# EAGLE board riffle-beta-0.1.3.1 (EAGLE 7.5.0)
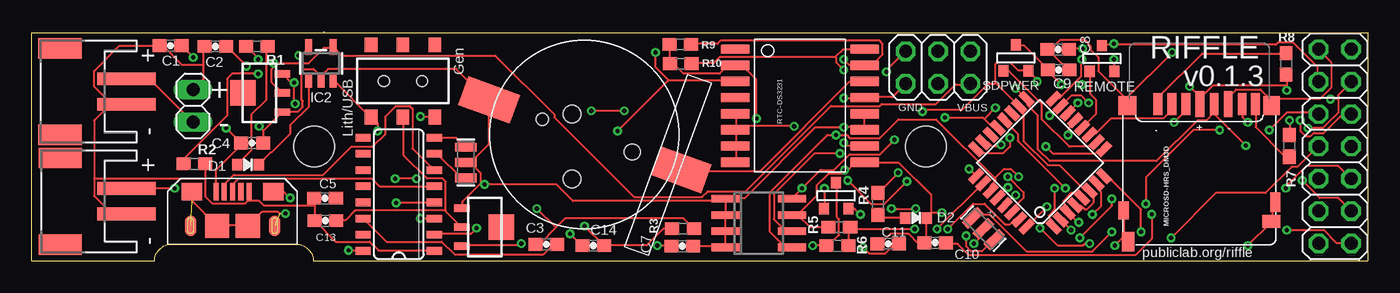
[diagram p0: board, top side]
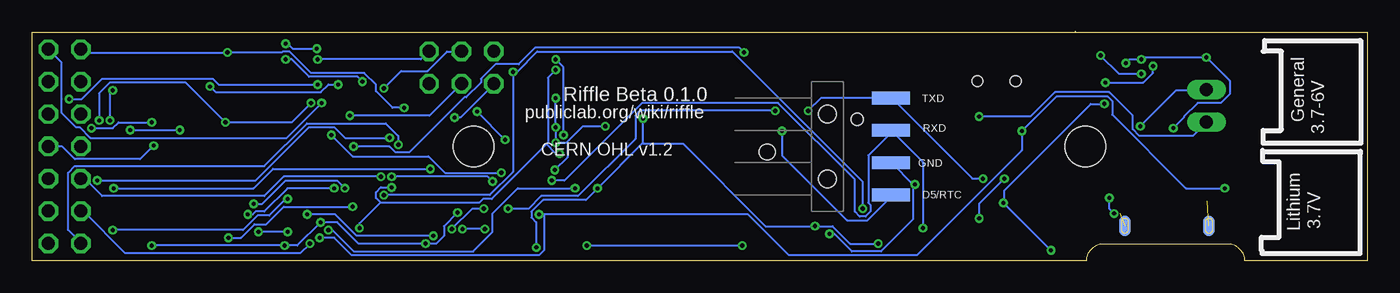
[diagram p1: board, bottom side, seen from below]

Size 104.8 x 18.01 mm. Coordinates in mm from the lower left corner, seen from the top.
Outline: 22.91,18.01 22.96,18.01
Outline: 0,0 0,17.96 104.8,17.96 104.8,0 22.07,0 arc90 20.75,1.32 10.95,1.32 arc90 9.63,0 0,0
Copper layers (1*16): Top 0.0356mm / dielectric 1.5011mm / Bottom 0.0356mm
Design rules "LaenPCBOrder": minimum track width 6mil, minimum drill 13mil, track to track 6mil, track to pad 6mil, pad to pad 6mil, via to via 6mil, smd to smd 6mil, copper to edge 15mil, drill to drill 6mil, minimum pad ring 7mil, minimum via ring 7mil, stop-mask expansion 3mil, vias tented up to drill 0mil, thermal gap 10mil
Holes 3.2 mm at 70.13,9 22.13,9

## Footprints (pad centres in the part's own frame; a part is rotated, then mirrored left to right if it is on the bottom)
BATTCON_12MM_SMT = smd 2.4 x 4.3: P$1 0,11.96 | smd 2.4 x 4.2: P$2 0,-4.1 | hole 0.95: 0,7.5 | hole 1.25: 0,0
SOT-23 = smd 0.787 x 0.889: 1 0.025,-1.016; 2 -0.94,1.016; 3 0.991,1.016
0603-CAP = smd 1.1 x 1: 1 -0.85,0; 2 0.85,0
JST-PH-2-SMT-RA = smd 1 x 4.6: 1 1,-3.7; 2 -1,-3.7 | smd 1.6 x 3.4: NC1 -3.4,1.5; NC2 3.4,1.5
0603-LED = smd 0.8 x 0.9: MINUS -0.85,0; PLUS 0.85,0
TQFP32-08 = smd 1.27 x 0.559: 1 -4.293,2.8; 2 -4.293,2; 3 -4.293,1.2; 4 -4.293,0.4; 5 -4.293,-0.4; 6 -4.293,-1.2; 7 -4.293,-2; 8 -4.293,-2.8; 17 4.293,-2.8; 18 4.293,-2; 19 4.293,-1.2; 20 4.293,-0.4; 21 4.293,0.4; 22 4.293,1.2; 23 4.293,2; 24 4.293,2.8 | smd 0.559 x 1.27: 9 -2.8,-4.293; 10 -2,-4.293; 11 -1.2,-4.293; 12 -0.4,-4.293; 13 0.4,-4.293; 14 1.2,-4.293; 15 2,-4.293; 16 2.8,-4.293; 25 2.8,4.293; 26 2,4.293; 27 1.2,4.293; 28 0.4,4.293; 29 -0.4,4.293; 30 -1.2,4.293; 31 -2,4.293; 32 -2.8,4.293
SO16 = smd 0.6 x 1.2: 1 -4.445,-2.8; 2 -3.175,-2.8; 3 -1.905,-2.8; 4 -0.635,-2.8; 5 0.635,-2.8; 6 1.905,-2.8; 7 3.175,-2.8; 8 4.445,-2.8; 9 4.445,2.8; 10 3.175,2.8; 11 1.905,2.8; 12 0.635,2.8; 13 -0.635,2.8; 14 -1.905,2.8; 15 -3.175,2.8; 16 -4.445,2.8
SOT89 = smd 0.58 x 1.2: 1 -1.5,-1.8; 2 0,-1.8; 3 1.5,-1.8 | smd 2 x 2: 4 0,1.3
SO-08 = smd 0.6 x 2.2: 1 -1.905,-2.6; 2 -0.635,-2.6; 3 0.635,-2.6; 4 1.905,-2.6; 5 1.905,2.6; 6 0.635,2.6; 7 -0.635,2.6; 8 -1.905,2.6
2X03 = drill 1.016 octagon: 1 -2.54,-1.27; 2 -2.54,1.27; 3 0,-1.27; 4 0,1.27; 5 2.54,-1.27; 6 2.54,1.27
AYZ0202 = smd 1 x 1.15: 1 -2.5,2.825; 2 0,2.825; 3 2.5,2.825; 4 -2.5,-2.825; 5 0,-2.825; 6 2.5,-2.825 | hole 0.85: 1.5,0; -1.5,0
MICROUSB-RIGHT = smd 0.4 x 1.35: 1 -1.3,1.27; 2 -0.65,1.27; 3 0,1.27; 4 0.65,1.27; 5 1.3,1.27 | smd 0.9 x 1.6: S1 -3.3,-1.4; S2 3.3,-1.4 | smd 1.6 x 1.4: S3 -3.2,1.27; S4 3.2,1.27 | smd 1.9 x 1.9: S5 -1.2,-1.405; S6 1.2,-1.405 | smd 0.9 x 1.6 bottom: S7 -3.3,-1.4; S8 3.3,-1.4
1X02 = drill 1.016 long: 1 -1.27,0; 2 1.27,0
1X04-SMD = smd 1 x 3: 1 -3.81,5; 2 -1.27,5; 3 1.27,5; 4 3.81,5 | hole 1.4: -2.54,0; 2.54,0
2X07 = drill 1.016 octagon: 1 -7.62,-1.27; 2 -7.62,1.27; 3 -5.08,-1.27; 4 -5.08,1.27; 5 -2.54,-1.27; 6 -2.54,1.27; 7 0,-1.27; 8 0,1.27; 9 2.54,-1.27; 10 2.54,1.27; 11 5.08,-1.27; 12 5.08,1.27; 13 7.62,-1.27; 14 7.62,1.27
0603-NO = smd 1.1 x 1: 1 -0.85,0; 2 0.85,0
DS3231 = smd 0.762 x 2.286: 1 -4.445,-5.08; 2 -3.175,-5.08; 3 -1.905,-5.08; 4 -0.635,-5.08; 5 0.635,-5.08; 6 1.905,-5.08; 7 3.175,-5.08; 8 4.445,-5.08; 9 4.445,5.08; 10 3.175,5.08; 11 1.905,5.08; 12 0.635,5.08; 13 -0.635,5.08; 14 -1.905,5.08; 15 -3.175,5.08; 16 -4.445,5.08
SOT23-5 = smd 0.55 x 1.2: 1 -0.95,-1.3; 2 0,-1.3; 3 0.95,-1.3; 4 0.95,1.3; 5 -0.95,1.3
DM3D = smd 0.7 x 1.75: CD/DAT3 8.15,0.45; CLK 4.85,0.45; CMD 7.05,0.45; DAT0 2.65,0.45; DAT1 1.6,0.45; DAT2 9.25,0.45 | smd 0.8 x 1.5: GND1 0.05,8.15 | smd 0.8 x 1.4: GND2 11.95,8.8 | smd 1.4 x 1.5: GND3 11.65,0.55 | smd 1.3 x 1.5: GND4 0.35,0.55 | smd 1 x 1.55: SW_A 11.6,11.25 | smd 1.4 x 1: SW_B 0.35,9.65 | smd 0.7 x 2.032: VDD 5.95,0.45; VSS 3.75,0.45
RESONATOR-SMD = smd 0.7 x 1.7: 1 -1.2,0; 2 0,0; 3 1.2,0

## Placement (x,y rotation side)
BAT  CR1220  [BATTCON_12MM_SMT]  47.1,8.57 70 top
BATTPOWER  FDN340P  [SOT-23]  63.12,5.14 180 top
C1  10uF  [0603-CAP]  10.88,16.92 0 top
C2  0.1uF  [0603-CAP]  14.39,16.86 180 top
C3  0.1uF  [0603-CAP]  40.37,1.31 0 top
C4  10uF  [0603-CAP]  17.28,9.28 0 top
C5  10uF  [0603-CAP]  23,4.94 180 top
C7  0.1uF  [0603-CAP]  51.03,1.17 180 top
C8  0.1uF  [0603-CAP]  80.53,16.62 180 top
C9  0.1uF  [0603-CAP]  80.57,15.01 180 top
C10  0.1uF  [0603-CAP]  70.86,1.44 180 top
C11  0.1uF  [0603-CAP]  67.19,1.36 0 top
C13  10uF  [0603-CAP]  23.04,3.17 180 top
C14  10uF  [0603-CAP]  44.04,1.22 180 top
CN1  [JST-PH-2-SMT-RA]  3.72,4.7 90 top
CN2  [JST-PH-2-SMT-RA]  3.71,13.31 90 top
D1  LED0603  [0603-LED]  16.96,7.57 180 top
D2  LED0603  [0603-LED]  69.37,3.38 180 top
IC1  ATMEGA328P  [TQFP32-08]  79.09,7.72 135 top
IC3  CH340G  [SO16]  28.79,5.24 90 top
IC4  MCP1700-33  [SOT89]  35.53,2.67 270 top
IC5  24AA128SN  [SO-08]  57.02,2.98 270 top
IC6  MCP1700-33  [SOT89]  17.86,13.21 90 top
ISP  [2X03]  71.1,15.2 180 top
J1  AYZ0202  [AYZ0202]  29.11,14.14 180 top
J2  [MICROUSB-RIGHT]  15.75,4.17 0 top
JP1  [1X02]  12.64,12.2 90 top
JP3  [1X04-SMD]  42.39,9 270 bottom
JP5  [2X07]  102.23,9.01 270 top
R1  10K  [0603-NO]  17.66,16.87 180 top
R2  4.7K  [0603-NO]  12.74,7.65 180 top
R3  10K  [0603-NO]  51.09,2.55 180 top
R4  10K  [0603-NO]  66.37,4.5 90 top
R5  10K  [0603-NO]  63.35,2.66 0 top
R6  10K  [0603-NO]  63.2,1.22 180 top
R7  10K  [0603-NO]  98.65,9.05 270 top
R8  10K  [0603-NO]  98.4,15.49 270 top
R9  10K  [0603-NO]  50.91,15.5 180 top
R10  10K  [0603-NO]  50.88,17.03 180 top
REMOTE  FDN340P  [SOT-23]  83.98,15.91 180 top
RTC-DS3231  DS3231  [DS3231]  60.27,12.21 270 top
SDPWER  FDN340P  [SOT-23]  77.23,15.95 180 top
U1  MCP73831T-2ACI/OT  [SOT23-5]  22.68,15.52 0 top
U$1  MICROSD-HRS_DM3D  [DM3D]  97.6,12.78 180 top
X2  12MHz  [RESONATOR-SMD]  34.06,7.74 90 top
X3  16 MHz  [RESONATOR-SMD]  74.66,2.55 135 top

## Library data of the parts
BAT IC3 J1 X2 = SparkFunNew
BATTPOWER REMOTE SDPWER = zetex; OC_FARNELL: unknown; OC_NEWARK: unknown
C1-C5 C7-C11 C13 C14 JP3 X3 = SparkFun
CN1 CN2 IC4 IC6 = adafruit
D1 D2 = LowPowerLab
IC1 = atmel; MPN: ATMEGA8-16AU; OC_FARNELL: 9171371; OC_NEWARK: 73M8863
IC5 = microchip; MF: MICROCHIP; MPN: 24AA128-I/SN; OC_FARNELL: unknown; OC_NEWARK: 92C6842
ISP JP1 JP5 = pinhead
J2 = MF_Connectors
R1-R10 U1 = microbuilder
RTC-DS3231 = _lh-library
U$1 = hrs_DM3D-SF

## Nets
A0: IC1.23 JP5.13
A1: IC1.24 JP5.12
A2: IC1.25 JP5.10
A3: IC1.26 R5.2 R6.1
AREF: C10.1 IC1.20
D2: IC1.32 JP5.7
D3: IC1.1 JP5.5
D4: BATTPOWER.3 IC1.2
D5/RTC: IC1.9 JP3.4 RTC-DS3231.3
D6: IC1.10 SDPWER.3
D7: IC1.11 U$1.CD/DAT3
D8: IC1.12 REMOTE.3
D9: IC1.13 R4.2
D10: IC1.14 JP5.2
D+: IC3.5 J2.3
D-: IC3.6 J2.2
GND: BAT.P$1 C1.1 C2.2 C4.2 C5.2 C7.1 C8.2 C9.1 C10.2 C11.1 C13.2 C14.2 CN1.2 CN2.2 D2.MINUS IC1.3 IC1.5 IC1.21 IC3.1 IC4.1 IC5.1 IC5.2 IC5.3 IC5.4 IC5.7 IC6.1 ISP.6 J2.5 JP1.2 JP3.3 JP5.1 R2.1 R5.1 RTC-DS3231.5 RTC-DS3231.6 RTC-DS3231.7 RTC-DS3231.8 RTC-DS3231.9 RTC-DS3231.10 RTC-DS3231.11 RTC-DS3231.12 RTC-DS3231.13 U1.2 U$1.GND1 U$1.GND2 U$1.GND3 U$1.GND4 U$1.SW_A U$1.SW_B U$1.VSS X2.2 X3.2
MISO: IC1.16 ISP.1 JP5.4 U$1.DAT0
MOSI: IC1.15 ISP.4 JP5.6 U$1.CMD
N$1: D1.PLUS R1.1
N$2: IC1.7 X3.1
N$3: IC1.8 X3.3
N$4: C9.2 R7.1 R8.2 SDPWER.1 U$1.VDD
N$5: D1.MINUS U1.1
N$6: R2.2 U1.5
N$7: C8.1 JP5.3 REMOTE.1
N$8: C2.1 IC3.4 IC3.16 IC6.3
N$11: IC3.7 X2.1
N$13: IC3.8 X2.3
N$15: BATTPOWER.1 C7.2 R6.2
N$16: R7.2 U$1.DAT1
N$17: D2.PLUS R4.1
N$18: R8.1 U$1.DAT2
RESET: C3.1 IC1.29 ISP.5 R3.1
RST: C3.2 IC3.14
RTC_BATT: BAT.P$2 RTC-DS3231.14
RXD: IC1.30 IC3.2 JP3.2
SCK: IC1.17 ISP.3 JP5.8 U$1.CLK
SCL: IC1.28 IC5.6 JP5.11 R9.1 RTC-DS3231.16
SDA: IC1.27 IC5.5 JP5.9 R10.1 RTC-DS3231.15
SLD: J2.S1 J2.S2 J2.S3 J2.S4 J2.S5 J2.S6 J2.S7 J2.S8
TXD: IC1.31 IC3.3 JP3.1
VBAT [vcc]: BATTPOWER.2 CN1.1 J1.3 JP5.14 U1.3
VBUS [vcc]: C1.2 C4.1 IC6.2 ISP.2 J2.1 R1.2 U1.4
VCC: C11.2 C14.1 IC1.4 IC1.6 IC1.18 IC4.3 IC5.8 R3.2 R9.2 R10.2 REMOTE.2 RTC-DS3231.2 SDPWER.2
VDD: C13.1 IC4.2 J1.2
VGEN: CN2.1 J1.1 JP1.1

## Tracks (layer width: path | path; a pad name or v marks a point on that pad's centre or on a via)
A0  (via drill 0.33)
  Top 0.152: v76.05,9.14 75.9,8.99 75.36,8.99 75.06,9.3 74.68,9.3 IC1.23
  Bottom 0.152: v76.05,9.14 76.05,9.83 77.04,10.82 83.21,10.82 86.56,7.47 101.42,7.47 101.96,6.93 101.96,2.44 100.96,1.45 JP5.13
A1  (via drill 0.33)
  Top 0.152: v76.73,9.68 76.73,8.99 76.2,8.46 74.75,8.46 74.45,8.76 74.14,8.76 IC1.24 | v99.67,6.33 101.04,4.95 102.49,4.95 103.48,3.96 JP5.12
  Bottom 0.152: v76.73,9.68 80.24,9.68 81.08,10.52 83.06,10.52 87.25,6.33 v99.67,6.33
A2  (via drill 0.33)
  Top 0.152: v73.53,7.24 74.07,6.71 IC1.25 | v98.37,5.71 98.37,5.87 99.97,7.47 102.49,7.47 103.48,6.48 JP5.10
  Bottom 0.152: v73.53,7.24 85.88,7.24 87.4,5.71 v98.37,5.71
A3  (via drill 0.33)
  Top 0.152: R6.1 64.08,1.22 64.08,2.52 64.16,2.59 R5.2 64.16,2.52 v69.27,2.52 | v71.02,2.52 74.6,6.1 IC1.26
  Bottom 0.152: v69.27,2.52 v71.02,2.52
AREF  (via drill 0.33)
  Top 0.152: v87.86,3.66 87.86,1.75 86.56,0.46 73.53,0.46 72.62,1.37 71.78,1.37 C10.1 | v81.08,5.71 77.34,9.45 77.34,9.98 76.35,10.97 IC1.20
  Bottom 0.152: v87.86,3.66 87.48,3.66 87.25,3.89 86.56,3.89 84.73,5.71 v81.08,5.71
D2  (via drill 0.33)
  Top 0.152: v79.63,4.27 78.1,2.74 IC1.32 | v89.38,1.83 92.89,5.33 96.77,5.33 98.83,7.39 99.29,7.39 100.89,8.99 JP5.7
  Bottom 0.152: v79.63,4.27 85.04,4.27 86.41,2.9 87.33,2.9 88.39,1.83 v89.38,1.83
D3  (via drill 0.33)
  Top 0.152: v80.24,5.71 80.24,4.04 79.78,3.58 79.78,3.43 80.09,3.12 80.09,2.74 IC1.1 | v87.4,4.5 87.4,6.55 91.14,10.29 v93.19,10.29 | v97.08,10.29 98.45,11.66 100.81,11.66 100.89,11.58 JP5.5
  Bottom 0.152: v80.24,5.71 80.85,6.33 84.89,6.33 86.72,4.5 v87.4,4.5 | v97.08,10.29 v93.19,10.29
D4  (via drill 0.33)
  Top 0.152: v62.18,5.71 62.18,4.19 BATTPOWER.3 | v81.53,2.44 80.77,3.2 IC1.2
  Bottom 0.152: v62.18,5.71 66.67,5.71 68.66,3.73 68.66,2.29 70.18,0.76 79.55,0.76 81.23,2.44 v81.53,2.44
D5/RTC  (via drill 0.33)
  Top 0.152: v79.55,8.99 80.09,8.46 83.44,8.46 83.74,8.76 84.05,8.76 IC1.9 | v48.92,16.38 48.92,15.24 49.95,14.21 | 49.95,14.21 49.99,14.17 55.17,14.17 RTC-DS3231.3 | 49.95,14.21 v45.95,10.21
  Bottom 0.152: v79.55,8.99 76.73,8.99 76.28,8.53 75.21,8.53 70.87,12.88 70.71,12.88 69.57,14.02 69.57,14.33 68.43,15.47 66.6,15.47 65.3,16.76 49.3,16.76 v48.92,16.38 | v45.95,10.21 45.95,8.31 40.84,3.2 39.24,3.2 37.41,5.03 37.41,5.18 JP3.4
D6
  Top 0.152: SDPWER.3 76.28,14.94 76.66,14.94 79.25,12.34 79.25,11.12 81.38,8.99 83.21,8.99 83.52,9.3 IC1.10
D7
  Top 0.152: IC1.11 82.98,9.98 83.44,9.98 84.66,11.2 88.77,11.2 89.38,11.81 89.38,12.27 U$1.CD/DAT3
D8
  Top 0.152: REMOTE.3 83.06,14.86 83.06,13.11 83.52,12.65 83.52,11.58 82.45,10.52 IC1.12
D9  (via drill 0.33)
  Top 0.152: v67.97,6.93 66.45,5.41 R4.2 | v81.31,9.91 81.31,10.44 81.84,10.97 IC1.13
  Bottom 0.152: v67.97,6.93 72.39,6.93 73.69,8.23 79.63,8.23 v81.31,9.91
D10  (via drill 0.33)
  Top 0.152: v82.07,12.42 81.31,11.66 IC1.14
  Bottom 0.152: v82.07,12.42 84.81,9.68 100.2,9.68 101.04,10.52 101.35,10.52 102.49,11.66 102.49,15.62 103.48,16.61 JP5.2
D+
  Top 0.152: IC3.5 31.55,5.87 27.28,5.87 26.67,6.48 16.23,6.48 15.77,6.02 15.77,5.49 J2.3
D-
  Top 0.152: IC3.6 31.55,7.16 29.87,8.84 29.87,11.96 29.64,12.19 28.57,12.19 27.74,11.35 27.74,9.98 26.75,8.99 25.07,8.99 22.86,6.78 15.85,6.78 15.16,6.1 15.16,5.49 J2.2
GND  (via drill 0.33)
  Top 0.152: R5.1 62.48,2.67 61.04,2.67 60.12,3.58 59.66,3.58 IC5.7 60.2,3.58 60.2,3.73 61.57,5.11 61.57,5.94 62.48,6.86 63.7,6.86 63.89,7.05 | U$1.GND2 85.72,3.96 85.72,1.83 85.95,1.6 U$1.SW_A 85.72,1.75 85.5,1.75 v84.96,1.22 | U$1.GND1 97.54,4.57 97.31,4.34 97.31,3.2 U$1.SW_B 97.23,3.05 v95.4,1.22 | IC1.5 82.37,5.03 82.07,5.33 81.53,5.33 80.92,4.72 80.92,4.57 81.23,4.27 81.23,3.89 IC1.3 81.31,3.81 82.07,3.05 v82.14,3.05 | D2.MINUS 70.18,3.35 70.18,1.6 70.03,1.45 C10.2 69.95,1.45 69.49,1.45 68.81,2.13 67.36,2.13 66.6,1.37 66.37,1.37 C11.1 | v73.91,1.37 74.6,2.06 74.6,2.52 X3.2 | v71.4,3.81 70.64,3.81 70.26,3.43 D2.MINUS | D2.MINUS 70.56,3.81 70.56,5.18 68.05,7.7 65.38,7.7 RTC-DS3231.9 65.3,7.7 64.54,7.7 63.89,7.05 | 13.64,6.48 13.64,5.03 14.17,4.5 16.69,4.5 16.95,4.76 | 13.64,6.48 13.64,7.62 R2.1 | 16.95,4.76 16.99,4.8 16.99,5.41 J2.5 | 31.62,0.84 IC3.1 31.55,0.84 27.2,0.84 26.52,1.52 23.85,1.52 22.25,3.12 C13.2 22.17,3.2 22.17,4.34 | 22.17,4.34 22.17,4.88 C5.2 | 22.17,4.34 18.21,4.34 17.83,4.72 16.99,4.72 16.95,4.76 | 13.49,15.39 13.49,14.33 12.65,13.49 JP1.2 | 13.49,15.39 13.49,16.84 C2.2 | 13.49,15.39 11.81,15.39 10.29,16.92 10.06,16.92 C1.1 9.98,16.92 6.86,16.92 4.88,14.94 4.88,13.72 6.25,12.34 7.39,12.34 CN2.2 6.17,12.34 4.88,11.05 4.88,6.48 | 4.88,6.48 4.88,5.11 6.25,3.73 7.39,3.73 CN1.2 | 4.88,6.48 13.64,6.48 | v42.21,2.13 43.13,1.22 C14.2 | 18.17,10.25 19.58,11.66 IC6.1 19.66,11.73 20.88,11.73 21.26,12.12 21.26,12.57 21.18,12.65 21.18,14.94 21.34,15.09 22.1,15.09 22.63,14.55 22.63,14.25 U1.2 22.63,14.63 22.78,14.63 23.24,15.09 33.3,15.09 35.74,12.65 BAT.P$1 35.81,12.65 35.81,9.14 34.52,7.85 34.52,7.7 X2.2 34.06,7.7 34.44,7.7 35.2,6.93 35.2,6.1 35.17,6.06
  Top 0.152: 18.17,10.25 18.14,10.21 18.14,9.3 C4.2 | 35.17,6.06 33.76,4.65 33.76,4.19 IC4.1 | 35.17,6.06 35.2,6.02 v35.51,6.02 41.15,6.02 42.44,4.72 54.41,4.72 | C9.1 81.38,15.09 81.23,15.09 79.71,16.61 C8.2 79.86,16.54 80.7,17.37 82.6,17.37 83.06,16.92 83.06,16.61 83.67,16 83.67,14.94 85.88,12.72 85.88,12.27 U$1.GND3 85.88,12.8 v89.46,16.38 | U$1.VSS 93.88,12.34 93.88,12.88 94.49,13.49 96.39,13.49 97.23,12.65 97.23,12.27 U$1.GND4 97.23,12.72 101.04,12.72 101.96,13.64 101.96,15.62 100.96,16.61 JP5.1 | 75.74,10.52 IC1.21 75.67,10.52 75.36,10.52 74.71,11.16 | 74.71,11.16 74.6,11.28 v71.63,11.28 | ISP.6 68.5,13.87 67.51,12.88 65.38,12.88 RTC-DS3231.13 65.3,12.8 v63.7,12.8 | RTC-DS3231.8 55.24,7.77 55.24,8.99 RTC-DS3231.7 55.24,9.07 55.24,10.29 RTC-DS3231.6 | 55.24,10.59 55.24,11.51 RTC-DS3231.5 | 55.24,10.59 55.24,10.36 RTC-DS3231.6 | v63.7,9.3 63.93,9.07 65.3,9.07 RTC-DS3231.10 | RTC-DS3231.12 65.3,11.51 65.3,10.44 RTC-DS3231.11 65.3,10.36 65.15,10.52 v63.7,10.52 61.49,10.52 55.93,4.95 54.48,4.95 IC5.1 | 54.41,4.72 54.41,4.88 IC5.1 | 54.41,4.72 54.41,3.66 IC5.2 54.41,3.58 54.41,2.36 IC5.3 54.41,2.29 54.41,1.22 IC5.4 | C7.1 51.89,1.14 54.41,1.14 IC5.4 | 54.41,1.07 IC5.4 | v59.82,10.59 55.24,10.59 | 55.24,10.59 RTC-DS3231.6 | 74.71,11.16 v75.59,12.04 | 54.41,4.72 IC5.1 | 18.17,10.25 v17.83,10.59 | v63.78,7.16 63.89,7.05
  Bottom 0.152: v71.4,3.81 72.47,2.74 72.47,1.98 73.08,1.37 v73.91,1.37 79.17,1.37 80.85,3.05 v82.14,3.05 83.97,1.22 v84.96,1.22 v95.4,1.22 | v42.21,2.13 41.83,2.13 40.46,0.76 38.18,0.76 35.66,3.28 35.66,6.02 | 35.66,6.02 37.34,7.7 JP3.3 | v35.51,6.02 35.66,6.02 | JP5.1 100.89,16.61 100.66,16.38 v89.46,16.38 85.19,16.38 85.12,16.46 84.58,16.46 82.91,14.78 78.71,14.78 77.8,13.87 77.8,13.34 76.5,12.04 v75.59,12.04 | v71.63,11.28 71.17,11.28 68.58,13.87 ISP.6 | v59.82,10.59 61.57,10.59 62.83,9.34 | 62.83,9.34 62.86,9.3 v63.7,9.3 v63.7,10.52 v63.7,12.8 | v17.83,10.59 15.01,13.41 12.65,13.41 JP1.2 | v63.78,7.16 62.79,8.15 62.79,9.3 62.83,9.34
MISO  (via drill 0.33)
  Top 0.152: 82.03,14.21 82.3,14.48 82.3,15.77 v82.37,15.85 | 82.03,14.21 80.62,12.8 80.16,12.8 IC1.16 | v95.4,10.9 95.02,11.28 95.02,12.27 U$1.DAT0 | v100.13,10.44 101.27,10.44 102.49,11.66 102.49,12.72 | 102.49,12.72 102.49,13.03 103.48,14.02 JP5.4 | v82.37,13.87 82.03,14.21 | 102.49,12.72 v101.88,12.72
  Bottom 0.152: v82.37,15.85 74.29,15.85 73.69,16.46 ISP.1 | v95.4,10.9 97.99,10.9 98.45,10.44 v100.13,10.44 | v82.37,13.87 90.14,13.87 90.6,14.33 99.29,14.33 100.89,12.72 v101.88,12.72
MOSI  (via drill 0.33)
  Top 0.152: v79.86,11.43 80.54,12.12 80.7,12.12 IC1.15 80.77,12.19 81.61,13.03 82.3,13.03 v82.91,12.42 | v89.61,10.9 90.53,11.81 90.53,12.27 U$1.CMD | v99.52,11.05 99.52,10.21 99.9,9.83 100.36,9.83 100.58,10.06 101.35,10.06 102.79,11.51 103.48,11.51 JP5.6
  Bottom 0.152: v79.86,11.43 73.61,11.43 71.17,13.87 ISP.4 | v82.91,12.42 84.43,10.9 v89.61,10.9 92.74,14.02 98.68,14.02 99.52,13.18 v99.52,11.05
N$1
  Top 0.152: D1.PLUS 16.15,7.62 17.22,8.69 17.22,11.51 18.36,12.65 18.36,16.76 18.44,16.84 R1.1
N$2  (via drill 0.33)
  Top 0.152: v83.21,3.66 83.9,4.34 83.9,5.41 83.59,5.71 83.59,6.1 IC1.7 | v73.3,1.98 73.3,1.14 73.69,0.76 74.52,0.76 75.44,1.68 X3.1
  Bottom 0.152: v83.21,3.66 81,3.66 79.32,1.98 v73.3,1.98
N$3  (via drill 0.33)
  Top 0.152: v87.02,2.29 87.02,4.04 84.43,6.63 84.12,6.63 IC1.8 | v84.73,2.29 83.21,0.76 78.03,0.76 75.13,3.66 74.07,3.66 73.84,3.43 X3.3
  Bottom 0.152: v84.73,2.29 v87.02,2.29
N$4  (via drill 0.33)
  Top 0.152: SDPWER.1 77.27,16.92 77.88,16.92 79.71,15.09 C9.2 79.71,14.94 v80.77,13.87 | v98.68,11.05 98.68,9.91 R7.1 | 98.45,13.79 98.45,14.63 R8.2 | 98.45,13.79 v98.45,13.41 | 98.45,13.79 92.66,13.79 91.67,12.8 91.67,12.34 U$1.VDD 91.67,12.88 v90.83,13.72
  Bottom 0.152: v98.68,11.05 98.68,13.18 v98.45,13.41 | v80.77,13.87 81.53,13.87 82.14,13.26 90.37,13.26 v90.83,13.72
N$5
  Top 0.152: D1.MINUS 17.83,7.62 18.75,8.53 18.82,8.53 20.27,9.98 20.27,10.67 21.72,12.12 21.72,14.17 U1.1
N$6  (via drill 0.33)
  Top 0.152: v17.75,14.71 15.7,14.71 15.32,14.33 15.32,11.43 11.96,8.08 11.96,7.7 R2.2 | v20.95,16.15 21.11,16.15 21.72,16.76 U1.5
  Bottom 0.152: v17.75,14.71 19.51,14.71 v20.95,16.15
N$7  (via drill 0.33)
  Top 0.152: 84.89,16.99 97.61,16.99 97.76,17.14 98.98,17.14 100.89,15.24 100.89,14.1 JP5.3 | 84.89,16.99 83.97,16.99 REMOTE.1 | v82.45,16.69 81.38,16.69 C8.1 | 84.89,16.99 v84.89,17.07
  Bottom 0.152: v82.45,16.69 84.35,16.69 84.73,17.07 v84.89,17.07
N$8  (via drill 0.33)
  Top 0.152: v16.84,15.32 15.32,16.84 C2.1 | IC6.3 20.35,14.02 v20.57,14.02 20.57,12.42 v20.65,12.34 | v24.84,0.84 25.98,0.84 IC3.16 | v28.57,4.57 31.55,4.57 IC3.4
  Bottom 0.152: v16.84,15.32 16.84,14.78 17.6,14.02 v20.57,14.02 | v24.84,0.84 v28.57,4.57 28.5,4.57 28.5,5.56 21.72,12.34 v20.65,12.34
N$11
  Top 0.152: IC3.7 31.62,8.38 31.85,8.38 33.68,6.55 33.99,6.55 X2.1
N$13
  Top 0.152: IC3.8 31.62,9.68 33.3,9.68 33.99,8.99 X2.3
N$15  (via drill 0.33)
  Top 0.152: BATTPOWER.1 63.17,6.1 63.17,3.43 63.32,3.28 63.32,2.06 62.41,1.14 R6.2 62.33,1.22 v61.26,1.22 | v49.07,1.22 50.14,1.22 C7.2
  Bottom 0.152: v61.26,1.22 v49.07,1.22
N$16
  Top 0.152: R7.2 98.6,8.23 98.3,8.23 96.01,10.52 96.01,12.27 U$1.DAT1
N$17
  Top 0.152: D2.PLUS 68.5,3.43 66.6,3.43 66.45,3.58 R4.1
N$18
  Top 0.152: R8.1 98.37,16.31 91.82,16.31 88.39,12.88 88.39,12.34 U$1.DAT2
RESET  (via drill 0.33)
  Top 0.152: 41.11,2.63 41.83,3.35 51.13,3.35 51.89,2.59 R3.1 | 41.11,2.63 39.85,1.37 39.55,1.37 C3.1 | v77.19,5.18 77.11,5.18 76.35,4.42 IC1.29 | v67.06,14.86 67.06,15.01 68.5,16.46 ISP.5 | v39.62,4.12 41.11,2.63
  Bottom 0.152: v77.19,5.18 68.88,5.18 67.06,7.01 v67.06,14.86 66.75,14.86 65.15,16.46 49.83,16.46 39.62,6.25 v39.62,4.12
RST
  Top 0.152: C3.2 41.15,1.29 40.92,1.29 40.16,0.53 33.15,0.53 32.16,1.52 27.81,1.52 26.06,3.28 IC3.14
RTC_BATT
  Top 0.152: RTC-DS3231.14 65.3,14.1 64.16,14.1 57.15,7.09 51.05,7.09 50.98,7.16 BAT.P$2
RXD  (via drill 0.33)
  Top 0.152: v34.9,2.59 34.44,2.13 31.62,2.13 IC3.2 | v76.58,6.63 77.8,5.41 77.8,4.95 76.96,4.12 76.96,3.89 IC1.30 | v68.66,6.25 66.9,4.5 65.84,4.5 v64.01,6.33
  Bottom 0.152: v34.9,2.59 34.9,7.77 37.34,10.21 JP3.2 37.34,10.13 39.17,8.31 39.17,4.57 39.01,4.42 39.01,3.89 39.4,3.5 39.85,3.5 40.23,3.89 40.23,6.4 46.25,12.42 56.92,12.42 63.02,6.33 v64.01,6.33 | v76.58,6.63 69.04,6.63 v68.66,6.25
SCK  (via drill 0.33)
  Top 0.152: v77.19,13.56 78.03,12.72 IC1.17 78.1,12.72 78.1,12.27 78.94,11.43 78.94,8.76 79.86,7.85 88.24,7.85 91.44,11.05 92.13,11.05 92.74,11.66 92.74,12.27 U$1.CLK 92.74,11.58 v95.25,9.07
  Bottom 0.152: v77.19,13.56 75.82,14.94 73.76,14.94 72.24,16.46 71.17,16.46 ISP.3 | v95.25,9.07 96.32,8 101.42,8 102.41,8.99 103.48,8.99 JP5.8
SCL  (via drill 0.33)
  Top 0.152: 63.06,16.04 63.63,16.61 65.3,16.61 RTC-DS3231.16 | 63.06,16.04 63.02,16 53.95,16 53.49,15.54 51.82,15.54 R9.1 | v76.58,5.79 75.82,5.03 IC1.28 | v63.7,15.01 63.09,15.62 63.09,16 63.06,16.04 | v63.4,8.46 61.42,8.46 58.22,5.26 58.22,3.28 59.13,2.36 59.59,2.36 IC5.6 | v82.98,1.37 82.6,1.37 82.45,1.22 80.47,1.22 v79.1,2.59
  Bottom 0.152: v76.58,5.79 77.42,5.79 77.8,5.41 77.8,4.95 77.46,4.61 | 77.46,4.61 77.42,4.57 69.72,4.57 69.42,4.88 68.73,4.88 64.43,9.18 | 64.43,9.18 64.31,9.3 64.31,14.4 v63.7,15.01 | v63.4,8.46 63.7,8.46 64.43,9.18 | v82.98,1.37 83.74,0.61 97.46,0.61 100.74,3.89 100.89,3.89 JP5.11 | v79.1,2.59 79.1,2.97 77.46,4.61
SDA  (via drill 0.33)
  Top 0.152: R10.1 51.74,17.07 53.8,17.07 54.03,17.3 66.52,17.3 66.75,17.07 66.75,16.23 65.91,15.39 65.38,15.39 RTC-DS3231.15 65.3,15.39 64.16,15.39 v63.7,15.85 | 75.55,6.51 70.94,11.12 67.97,11.12 66.52,9.68 64.16,9.68 63.93,9.91 v63.09,9.91 62.41,9.91 57.91,5.41 57.91,2.29 59.05,1.14 59.59,1.14 IC5.5 | 75.55,6.51 75.59,6.48 75.59,6.33 75.21,5.94 75.21,5.56 IC1.27 | v77.42,6.63 76.81,7.24 76.28,7.24 75.55,6.51
  Bottom 0.152: v77.42,6.63 85.04,6.63 86.56,5.11 99.29,5.11 100.58,6.4 100.89,6.4 JP5.9 | v63.7,15.85 63.09,15.24 v63.09,9.91
SLD  (via drill 0.33)  (4 unrouted)
  Top 0.152: J2.S3 12.57,5.41 12.57,4.72 14.48,2.82 J2.S5 14.55,2.82 16.92,2.82 J2.S6 16.99,2.82 18.06,3.89 19.28,3.89 19.43,3.73 v19.89,3.73 | v20.27,4.95 19.81,5.41 18.97,5.41 J2.S4
  Bottom 0.152: v20.27,4.95 20.27,4.12 v19.89,3.73
TXD  (via drill 0.33)
  Top 0.152: v30.48,3.35 31.55,3.35 IC3.3 | v30.18,6.48 v28.5,6.48 | v71.86,2.52 73.84,4.5 74.75,4.5 76.35,2.9 76.73,2.9 77.04,3.2 77.42,3.2 IC1.31 | v67.44,4.12 v69.34,4.12 | v43.89,11.81 v46.48,11.81
  Bottom 0.152: v30.48,3.35 30.48,4.5 v28.5,6.48 | v30.18,6.48 31.01,6.48 37.34,12.8 JP3.1 37.41,12.8 42.9,12.8 v43.89,11.81 | v71.86,2.52 70.26,4.12 v69.34,4.12 | v67.44,4.12 65.84,4.12 64.85,5.11 61.95,5.11 57.45,9.6 57.45,11.43 57.07,11.81 v46.48,11.81
VBAT  (via drill 0.33)
  Top 0.152: v65,3.66 64.54,4.12 64.08,4.12 BATTPOWER.2 | v27.13,10.21 27.13,10.82 26.67,11.28 J1.3 26.59,11.28 23.7,14.17 U1.3 | v98.45,2.44 101.35,2.44 102.34,1.45 103.48,1.45 JP5.14 | v84.73,4.88 84.73,4.34 v82.22,1.83 | v11.2,5.71 7.47,5.71 CN1.1
  Bottom 0.152: 64.62,3.66 48.62,3.66 45.42,0.46 35.36,0.46 27.13,8.69 v27.13,10.21 24.38,12.95 20.42,12.95 20.04,12.57 20.04,11.51 14.25,5.71 v11.2,5.71 | 64.62,3.66 v65,3.66 | v98.45,2.44 88.24,2.44 87.1,3.58 86.18,3.58 84.89,4.88 v84.73,4.88 | v82.22,1.83 81.08,1.83 79.71,0.46 65,0.46 64.62,0.84 64.62,3.66
VBUS  (via drill 0.33)
  Top 0.152: J2.1 14.48,5.49 14.48,7.16 16.38,9.07 16.38,9.22 C4.1 16.38,9.3 v15.24,10.44 | v17.75,15.85 17.75,15.93 16.84,16.84 R1.2 | IC6.2 19.58,13.26 18.82,14.02 18.82,15.09 18.97,15.24 v18.97,15.54 21.72,15.54 22.94,16.76 23.62,16.76 U1.4 23.7,16.76 24.31,16.15 36.35,16.15 41,11.51 41,11.28 47.24,5.03 52.58,5.03 53.04,5.49 56.01,5.49 62.71,12.19 66.52,12.19 66.67,12.34 70.94,12.34 72.47,13.87 73.61,13.87 ISP.2 | v12.65,16 C1.2
  Bottom 0.152: v18.97,15.54 18.67,15.85 v17.75,15.85 17.6,16 v12.65,16 10.82,14.17 10.82,13.11 11.51,12.42 13.33,12.42 14.4,11.35 14.4,11.28 v15.24,10.44
VCC  (via drill 0.33)
  Top 0.152: IC1.4 81.91,4.34 82.3,4.34 82.6,4.04 82.75,4.04 83.29,4.57 83.29,5.18 82.98,5.49 IC1.6 82.91,5.56 82.6,5.56 80.62,7.54 79.71,7.54 77.8,9.45 77.8,11.81 77.5,12.12 IC1.18 77.42,12.19 75.63,13.98 | 75.63,13.98 75.59,14.02 75.59,15.47 75.74,15.62 76.73,15.62 77.34,15.01 78.1,15.01 SDPWER.2 78.18,14.94 78.87,14.25 v78.87,14.1 | v84.89,15.85 84.89,14.94 REMOTE.2 | R3.2 50.22,2.52 49.53,2.52 48.23,1.22 C14.1 44.88,1.22 v43.36,2.74 | v38.4,1.37 38.25,1.22 33.76,1.22 IC4.3 | R10.2 50.06,16.99 50.06,15.54 R9.2 50.14,15.54 50.29,15.54 51.13,14.71 53.95,14.71 54.56,15.32 55.17,15.32 RTC-DS3231.2 55.24,15.32 55.78,15.32 56.85,14.25 v56.85,11.2 | v65.23,1.07 65.68,0.61 66.98,0.61 67.67,1.29 67.97,1.29 C11.2 | 59.59,4.88 IC5.8 59.66,4.95 v60.43,5.71 61.87,7.16 62.94,7.16 64.16,8.38 66.52,8.38 v67.67,9.53 | v69.88,11.73 70.03,11.89 73,11.89 75.06,13.95 75.59,13.95 75.63,13.98
  Bottom 0.152: v84.89,15.85 84.43,15.85 83.06,14.48 79.25,14.48 v78.87,14.1 | v38.4,1.37 40.61,1.37 41.99,2.74 v43.36,2.74 47.24,2.74 53.72,9.22 56.85,9.22 56.88,9.26 | v65.23,1.07 65.23,3.05 65.61,3.43 65.61,3.89 64.69,4.8 61.34,4.8 v60.43,5.71 56.88,9.26 | v56.85,11.2 56.85,9.3 56.88,9.26 | v67.67,9.53 v69.88,11.73
VDD
  Top 0.152: 32.42,3.92 33.68,2.67 IC4.2 | 32.42,3.92 32.38,3.96 25.37,3.96 24.61,3.2 23.93,3.2 C13.1 | J1.2 29.18,11.28 29.18,8.31 31.01,6.48 32.23,6.48 32.46,6.25 32.46,3.96 32.42,3.92
VGEN  (via drill 0.33)
  Top 0.152: v30.48,11.35 31.55,11.35 J1.1 | CN2.1 7.47,14.25 9.3,14.25 12.57,10.97 JP1.1
  Bottom 0.152: v30.48,11.35 26.44,11.35 24.54,13.26 20.27,13.26 18.44,11.43 18.44,10.36 17.91,9.83 13.72,9.83 12.65,10.9 JP1.1

## Text on the board
tPlace: Gen | RIFFLE | Lith/USB | v0.1.3 | + | IC2 | GND | VBUS | - | publiclab.org/riffle
bPlace: General | Riffle Beta 0.1.0 | TXD | RXD | publiclab.org/wiki/riffle | 3.7-6V | GND | CERN OHL v1.2 | Lithium | D5/RTC | 3.7V